# Altium PCB iobrd.PcbDoc
Units mm, origin at the board's own origin, x right, y up, seen from the top; angles counter-clockwise.
Board outline 68.58 x 99.06 mm, 2 copper layers (Top Layer, Bottom Layer); 69 components, 62 nets, 265 pads, 131 vias.
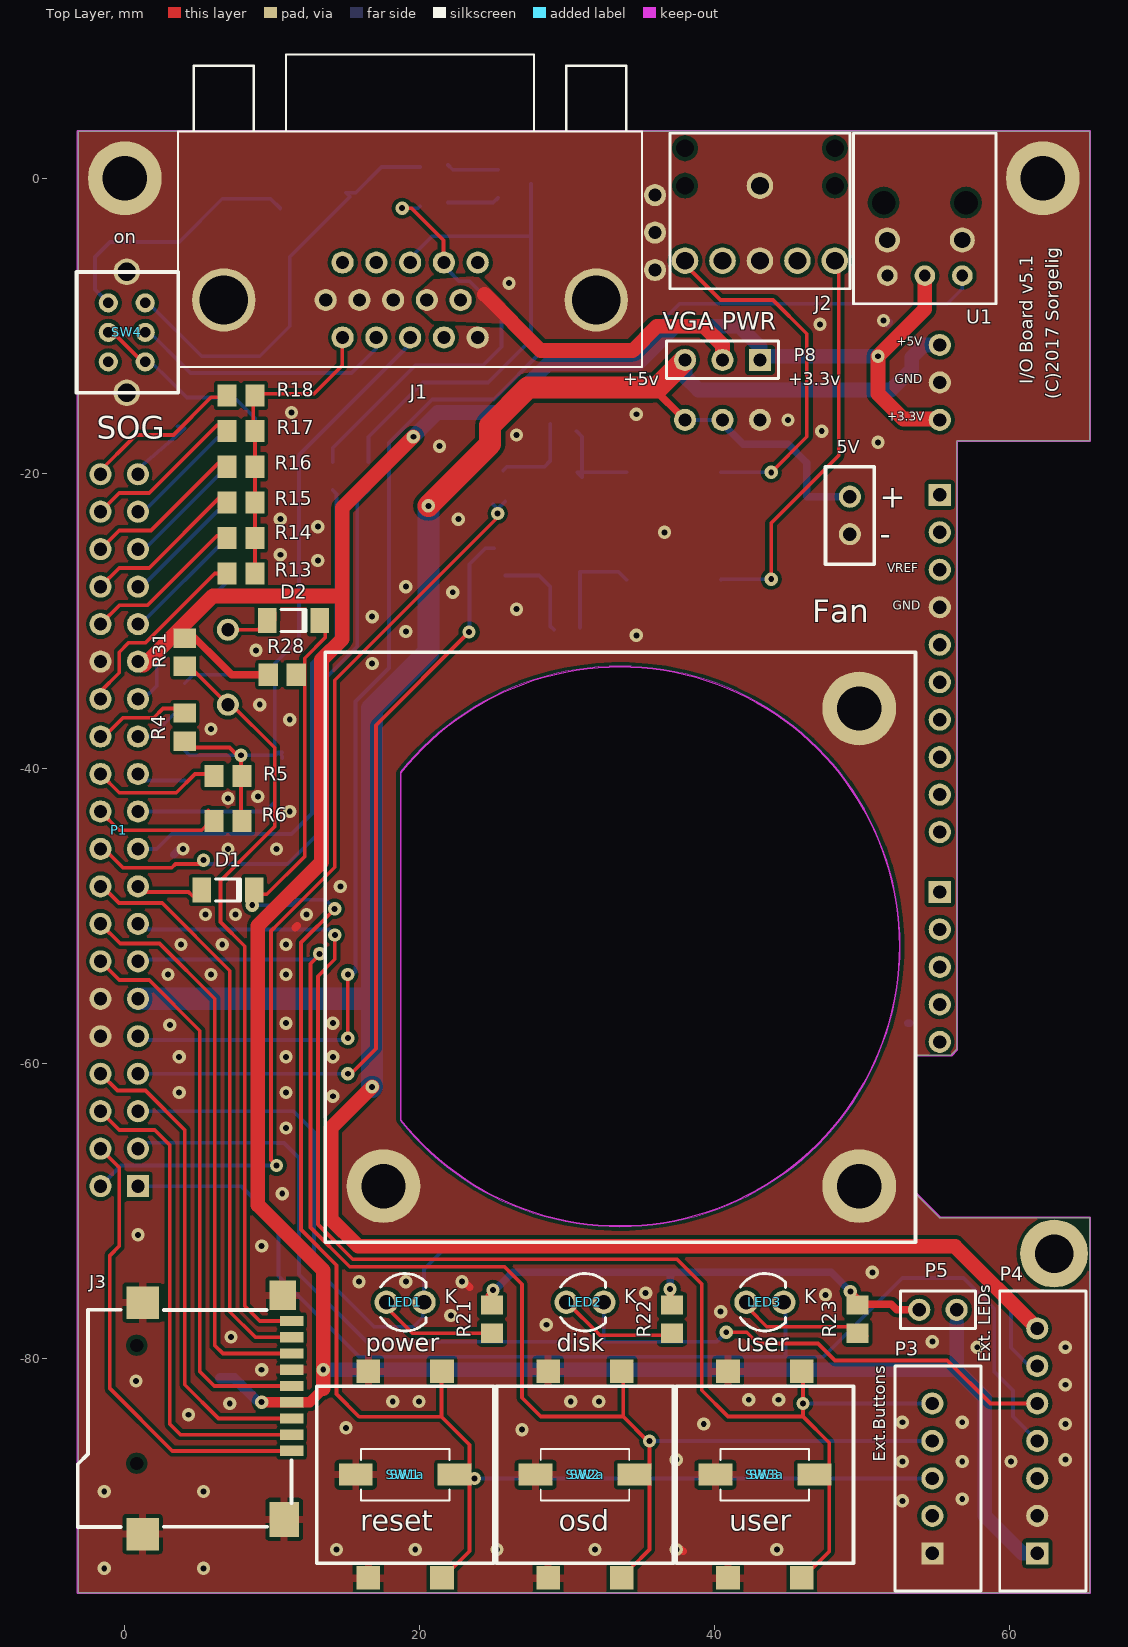
[diagram p0: Top Layer view]
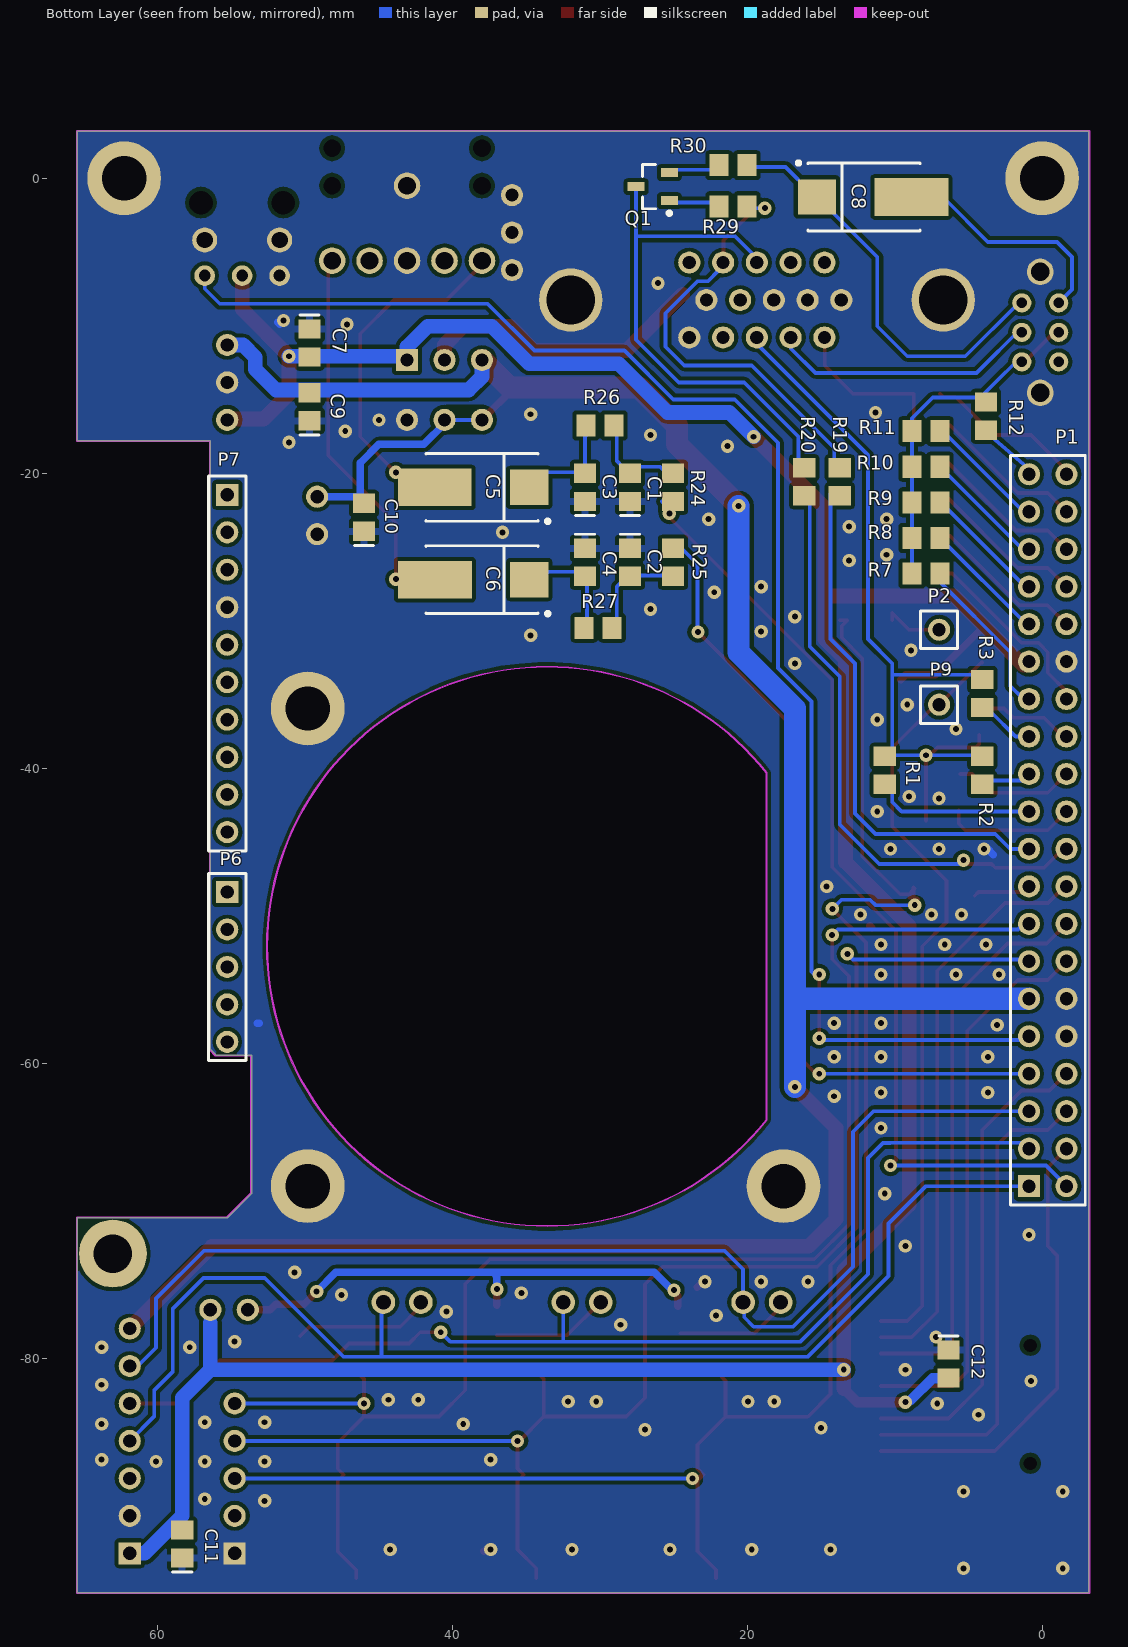
[diagram p1: Bottom Layer view, seen from below]

## Layer stack, top to bottom
Top Solder: solder mask 0.0102, Solder Resist, Dk 3.5
Top Layer: signal copper 0.0356
Dielectric 1: dielectric 0.32, FR-4, Dk 4.8
Bottom Layer: signal copper 0.0356
Bottom Solder: solder mask 0.0102, Solder Resist, Dk 3.5

## Board outline
55.245,-70.485 53.594,-68.834 53.594,-59.436 56.007,-59.436 56.388,-59.055 56.388,-17.78 65.405,-17.78 65.405,3.175 -3.175,3.175 -3.175,-95.885 65.405,-95.885 65.405,-70.485
cut-out: 18.669,-40.281 18.669,-63.87 ccw(c33.565,-52.075) 33.565,-71.075 ccw(c33.565,-52.075) 52.565,-52.075 ccw(c33.565,-52.075) 33.565,-33.075 ccw(c33.565,-52.075)

## Design rules (kind name [scope] priority, off if disabled: settings)
BoardOutlineClearance [All] p1: gap=0 ignorepadtopadclearanceinfootprint=FALSE
Clearance keep-out_Clearance [OnLayer('Keep-Out Layer')] p1: gap=0 ignorepadtopadclearanceinfootprint=TRUE
Clearance [All] p2: gap=0.254 ignorepadtopadclearanceinfootprint=TRUE except(0: Arc-Hole Track-Hole SMDPad-Hole THPad-Hole Via-Hole Fill-Hole Poly-Hole Region-Hole Text-Hole)
ComponentClearance [All] p1 off: gap=0.254 collisioncheckmode=3 verticalgap=0.254 showdistances=FALSE
Height [All] p1 off: minheight=0 maxheight=25.4 prefheight=12.7
HoleSize [All] p1: absolutevalues=TRUE maxlimit=5 minlimit=0.025 maxpercent=80.000 minpercent=20.000
MinimumSolderMaskSliver [All] p1: minsoldermaskwidth=0.127
PolygonConnect PolygonConnect_comp [HasFootprint('0805')] p1: connectstyle=Relief reliefconductorwidth=0.508 reliefentries=4 polygonreliefangle="90 Angle" airgapwidth=0.254
PolygonConnect PolygonConnect_comp_2 [HasFootprint('microsd')] p2: connectstyle=Relief reliefconductorwidth=0.508 reliefentries=4 polygonreliefangle="90 Angle" airgapwidth=0.254
PolygonConnect PolygonConnect_comp_3 [HasFootprint('tact 12x12')] p3: connectstyle=Relief reliefconductorwidth=0.508 reliefentries=4 polygonreliefangle="90 Angle" airgapwidth=0.254
PolygonConnect PolygonConnect_comp_1 [HasFootprint('434111050826')] p4: connectstyle=Relief reliefconductorwidth=0.508 reliefentries=4 polygonreliefangle="90 Angle" airgapwidth=0.254
PolygonConnect [All] p5: connectstyle=Direct reliefconductorwidth=0.254 reliefentries=4 polygonreliefangle="90 Angle" airgapwidth=0.254
RoutingVias [All] p1: holewidth=0.4 width=0.9 viastyle="Through Hole" minholewidth=0.4 minwidth=0.9 maxholewidth=0.4 maxwidth=1
SilkToSilkClearance [All] p1 off: silktosilkclearance=0.254
SilkToSolderMaskClearance [IsPad] p1 off: minsilkscreentomaskgap=0.254 clearancetoexposedcopper=TRUE
SolderMaskExpansion SolderMaskExpansion_J1 [InComponent('J1')] p1: expansion=0
SolderMaskExpansion [All] p2: expansion=0.051
Width Width_power [InNetClass('power')] p1: maxlimit=2 minlimit=0.254 preferedwidth=0.508 minimp=50.000000 maximp=50.000000 favimp=50.000000
Width Width_signal [All] p2: maxlimit=0.254 minlimit=0.254 preferedwidth=0.254
24 further rules are at their usual default settings.

## Classes and differential pairs
net class power: GND NetP5_1 VCC VDD VGA_PWR

## Components (designator, comment, footprint, x,y, rotation, side; value= is the part's Value field where it differs from the comment)
C1 "C0805" 0805 27.94,-20.955 r90 bottom value=10nF
C2 "C0805" 0805 27.94,-26.035 r270 bottom value=10nF
C3 "C0805" 0805 30.988,-20.955 r90 bottom value=10nF
C4 "C0805" 0805 30.988,-26.035 r270 bottom value=10nF
C5 "T520D" D 37.973,-20.955 r0 bottom value=100uF
C6 "T520D" D 37.966,-27.216 r0 bottom value=100uF
C7 "C0805" 0805 49.657,-11.176 r270 bottom value=1uF
C8 "T520D" D 12.065,-1.27 r180 bottom value=100uF
C9 "C0805" 0805 49.657,-15.494 r90 bottom value=10uF
C10 "C0805" 0805 45.974,-22.987 r90 bottom value=10uF
C11 "C0805" 0805 58.293,-92.583 r90 bottom value=10uF
C12 "C0805" 0805 6.35,-80.391 r270 bottom value=10uF
D1 "BAV100" SOD80C 6.985,-48.26 r0 top
D2 "BAV100" SOD80C 11.43,-29.972 r0 top
J1 "vga" VGA 19.304,3.175 r0 top locked
J2 "Audio" phonejack 43.053,3.048 r0 top locked
J3 "microsd" microsd 0.803,-84.072 r90 top locked
LED1 "power" "Type 3mm" 19.002,-76.2 r0 top locked
LED2 "disk" "Type 3mm" 31.194,-76.2 r0 top locked
LED3 "user" "Type 3mm" 43.386,-76.2 r0 top locked
P1 "GPIO1" HDR2X20 0.889,-68.326 r90 top locked
P2 "Header 1" "Header 1" 6.985,-30.607 r180 bottom locked
P3 "Ext.Buttons" HDR1X5 54.737,-93.218 r90 top locked
P4 "Ext. LEDs" HDR1X7 61.849,-93.218 r90 top locked
P5 "LEDs on/off" HDR1X2 53.848,-76.708 r0 top
P6 "Header 5" HDR1X5 55.245,-48.387 r270 bottom locked
P7 "Header 10" HDR1X10 55.245,-21.463 r270 bottom locked
P8 "VGA PWR" HDR1X3 43.053,-12.319 r180 top
P9 "Header 1" "Header 1" 6.985,-35.687 r180 bottom locked
Q1 "BC847" SOT-23B_N 26.398,-0.569 r0 bottom
R1 "510" 6-0805 10.668,-40.132 r270 bottom
R2 "1.1K" 6-0805 4.064,-40.132 r270 bottom
R3 "2.2K" 6-0805 4.064,-34.925 r270 bottom
R4 "4.3K" 6-0805 4.064,-37.211 r90 top
R5 "9.1K" 6-0805 6.985,-40.513 r180 top
R6 "18K" 6-0805 6.985,-43.561 r180 top
R7 "510" 6-0805 7.874,-26.797 r180 bottom
R8 "1.1K" 6-0805 7.874,-24.384 r180 bottom
R9 "2.2K" 6-0805 7.874,-21.971 r180 bottom
R10 "4.3K" 6-0805 7.874,-19.558 r180 bottom
R11 "9.1K" 6-0805 7.874,-17.145 r180 bottom
R12 "18K" 6-0805 3.81,-16.129 r270 bottom
R13 "510" 6-0805 7.874,-26.797 r0 top
R14 "1.1K" 6-0805 7.874,-24.384 r0 top
R15 "2.2K" 6-0805 7.874,-21.971 r0 top
R16 "4.3K" 6-0805 7.874,-19.558 r0 top
R17 "9.1K" 6-0805 7.874,-17.145 r0 top
R18 "18K" 6-0805 7.874,-14.732 r0 top
R19 "100" 6-0805 13.716,-20.574 r270 bottom
R20 "100" 6-0805 16.129,-20.574 r270 bottom
R21 "200" 6-0805 24.892,-77.343 r270 top
R22 "200" 6-0805 37.084,-77.343 r270 top
R23 "200" 6-0805 49.657,-77.343 r270 top
R24 "560" 6-0805 25.019,-20.955 r90 bottom
R25 "560" 6-0805 25.019,-26.035 r270 bottom
R26 "560" 6-0805 29.972,-16.764 r0 bottom
R27 "560" 6-0805 30.099,-30.48 r0 bottom
R28 "10K" 6-0805 10.668,-33.655 r180 top
R29 "1K" 6-0805 20.955,-1.905 r0 bottom
R30 "680" 6-0805 20.955,0.889 r0 bottom
R31 "10K" 6-0805 4.064,-32.131 r90 top
SW1 "reset" 434111050826 19.002,-87.884 r0 top locked
SW1a "" "tact 12x12" 19.002,-87.884 r0 top locked
SW2 "osd" 434111050826 31.194,-87.884 r0 top locked
SW2a "" "tact 12x12" 31.194,-87.884 r0 top locked
SW3 "user" 434111050826 43.386,-87.884 r0 top locked
SW3a "" "tact 12x12" 43.386,-87.884 r0 top locked
SW4 "SOG" "SW DPDT" 0.127,-10.45 r0 top locked
U1 "Toslink" TOSLINK 54.229,-6.604 r0 top locked

## Footprints (in the part's own frame and the unit in brackets; to place one, negate y for a bottom-side part, rotate by r counter-clockwise, add the part's x,y. Pads: shape width x height; smd on the part's side, far side on the other; paste and mask are expansions set on the pad)
6-0805 [mm] "Chip Resistor; Body 2 x 1.2 mm (LxW typ)"
  rect 1.3x1.5 smd: 1(-0.95,0) 2(0.95,0)
0805 [mm] "Chip Capacitor; Body 2.0 x 1.2 mm (LxW typ)"
  rect 1.3x1.5 smd: 1(-0.95,0) 2(0.95,0)
  silkscreen extent -1.9,-0.65 -1.9,0.65
434111050826 [mm] "6.0*3.5mm vertical type, SMD, height 5.0mm, white actuator, 260gf, T&R"
  rect 2.3x1.5 smd: 1(-3.35,0) 2(3.35,0)
  silkscreen extent -3,-1.75 3,1.75, body extent -4,-1.75 4,1.75, height 5
D [mm] "Capacitor, SM Tantalum; Body 7.3 x 4.3 mm (LxW typ)"
  rect 2.6x2.4 smd: 1(-3.2,0)
  rect 5x2.55 smd: 2(3.2,0)
  silkscreen extent -4.57,-2.3 3.8,2.42
HDR1X2 [mm] "Connector; Header; 2 Position"
  round 1.5 hole 0.9: 1(0,0) 2(2.54,0)
  silkscreen extent -1.27,-1.27 3.81,1.27
HDR1X3 [mm] "Connector; Header; 3 Position"
  rect 1.5x1.5 hole 0.9: 1(0,0)
  round 1.5 hole 0.9: 2(2.54,0) 3(5.08,0)
  silkscreen extent -1.27,-1.27 6.35,1.27
HDR1X5 [mm] "Connector; Header; 5 Position"
  rect 1.5x1.5 hole 0.9: 1(0,0)
  round 1.5 hole 0.9: 2(2.54,0) 3(5.08,0) 4(7.62,0) 5(10.16,0)
  silkscreen extent -2.54,-3.3 12.7,2.54
HDR1X7 [mm] "Connector; Header; 7 Position"
  rect 1.5x1.5 hole 0.9: 1(0,0)
  round 1.5 hole 0.9: 2(2.54,0) 3(5.08,0) 4(7.62,0) 5(10.16,0) 6(12.7,0) 7(15.24,0)
  silkscreen extent -2.54,-3.3 17.78,2.54
HDR1X10 [mm] "Connector; Header; 10 Position"
  rect 1.5x1.5 hole 0.9: 1(0,0)
  round 1.5 hole 0.9: 2(2.54,0) 3(5.08,0) 4(7.62,0) 5(10.16,0) 6(12.7,0) 7(15.24,0) 8(17.78,0) 9(20.32,0) 10(22.86,0)
  silkscreen extent -1.27,-1.27 24.13,1.27
HDR2X20 [mm] "Connector; Header; 20x2 Position"
  rect 1.5x1.5 hole 0.9: 1(0,0)
  round 1.5 hole 0.9: 2(0,2.54) 3(2.54,0) 4(2.54,2.54) 5(5.08,0) 6(5.08,2.54) 7(7.62,0) 8(7.62,2.54) 9(10.16,0) 10(10.16,2.54) 11(12.7,0) 12(12.7,2.54) 13(15.24,0) 14(15.24,2.54) 15(17.78,0) 16(17.78,2.54) 17(20.32,0) 18(20.32,2.54) 19(22.86,0) 20(22.86,2.54) 21(25.4,0) 22(25.4,2.54) 23(27.94,0) 24(27.94,2.54) 25(30.48,0) 26(30.48,2.54) 27(33.02,0) 28(33.02,2.54) 29(35.56,0) 30(35.56,2.54) 31(38.1,0) 32(38.1,2.54) 33(40.64,0) 34(40.64,2.54) 35(43.18,0) 36(43.18,2.54) 37(45.72,0) 38(45.72,2.54) 39(48.26,0) 40(48.26,2.54)
"Header 1" [mm]
  round 1.5 hole 0.9: 1(0,0)
  silkscreen extent -1.27,-1.27 1.25,1.27
microsd [mm]
  rect 0.7x1.6 smd: 1(-2.2,-10.5) 2(-1.1,-10.5) 3(0,-10.5) 4(1.1,-10.5) 5(2.2,-10.5) 6(3.3,-10.5) 7(4.4,-10.5) 8(5.5,-10.5) 9(6.6,-10.5)
  rect 2x1.8 smd mask+0.1: 10(8.35,-9.9)
  rect 2.2x2.2 smd mask+0.1: 11(7.85,-0.4) 12(-7.85,-0.4)
  rect 2.4x2 smd mask+0.1: 13(-6.85,-10)
  round 0 hole 0.9 unplated mask-0.9: ""(-3.05,0) ""(4.95,0)
  silkscreen extent -7.37,-10.5 7.37,4
phonejack [mm]
  round 1.8 hole 1.2: 1(0,-8.636) 1(0,-3.556) 2(-5.08,-8.636) 3(2.54,-8.636) 4(5.08,-8.636) 5(-2.54,-8.636)
  round 1 hole 1.2 unplated: ""(-5.08,-3.556) ""(-5.08,-1.016) ""(5.08,-3.556) ""(5.08,-1.016)
  silkscreen extent -6.1,-10.54 6.1,0
SOD80C [mm] "Metal Electrode Face (MELF) Diode; Body 3.5 x 1.6 mm (LxDia)"
  rect 1.25x1.7 smd: 1(-1.775,0) 2(1.775,0)
  silkscreen extent -0.85,-0.75 0.85,0.75
SOT-23B_N [mm] "SOT23, 3-Leads, Body 2.9x1.3mm, Pitch 0.95mm, Lead Span 2.4mm, IPC Medium Density"
  rect 1.15x0.6 smd: 1(-1.125,0.95) 2(-1.125,-0.95) 3(1.125,0)
  silkscreen extent -1.25,-1.5 0.7,1.92, body extent -0.7,-1.5 0.7,1.5, height 1.14
"SW DPDT" [mm]
  round 1.3 hole 0.7: 1(-1.25,2) 2(-1.25,0) 3(-1.25,-2) 4(1.25,-2) 5(1.25,0) 6(1.25,2)
  round 1.8 hole 1.25: 7(0,-4.1) 7(0,4.1)
  silkscreen extent -3.4,-4.1 3.5,4.1
"tact 12x12" [mm]
  rect 1.6x1.6 smd: 1(-2.5,7) 2(2.5,7) 3(-2.5,-7) 4(2.5,-7)
  silkscreen extent -6,-6 6,6
TOSLINK [mm]
  round 1.7 hole 1.1: 0(-2.54,2.413) 0(2.54,2.413)
  round 1.4 hole 0.8: 1(2.54,0) 2(0,0) 3(-2.54,0)
  round 1 hole 1.6 unplated: ""(-2.794,4.953) ""(2.794,4.953)
  silkscreen extent -4.83,-1.91 4.83,9.65
"Type 3mm" [mm] "THT, LED-3mm, 2pin- Body 4.15mm(max)"
  round 1.6 hole 1: 1(1.27,0) 2(-1.27,0)
  silkscreen extent -1.66,-1.95 1.4,1.95, body extent -1.93,-1.94 1.87,1.94, height 10.9
VGA [mm]
  round 1.5 hole 0.9: 1(-4.545,-13.97) 2(-2.255,-13.97) 3(0.035,-13.97) 4(2.325,-13.97) 5(4.615,-13.97) 6(-5.688,-11.43) 7(-3.402,-11.43) 8(-1.116,-11.43) 9(1.17,-11.43) 10(3.456,-11.43) 11(-4.545,-8.89) 12(-2.255,-8.89) 13(0.035,-8.89) 14(2.325,-8.89) 15(4.615,-8.89)
  round 4.3 hole 3.302: 16(-12.597,-11.43) 17(12.651,-11.43)
  silkscreen extent -15.7,-15.98 15.75,5.21

## Part data
C1 C2 C3 C4 C7 C9 C10 C11 C12: "Ceramic Chip Capacitor - Standard", PackageDocument=Mar-2001, Code_IPC=2012[0805], Code_JEITA=0805, ComponentLink1Description="Manufacturer Link", ComponentLink1URL=http://www.kemet.com/, ComponentLink2Description=Datasheet, ComponentLink2URL=http://www.kemet.com/kemet/web/homepage/kechome.nsf/vapubfilesname/F3102TA.pdf/$file/F3102TA.pdf, DatasheetDocument=Mar-2001, LatestRevisionDate=19-Mar-2004, LatestRevisionNote="Silkscreen size reduced.", Note="Footprint corresponds to dimensions for bulk cassette packaging. This case size has tightened tolerances.", PackageReference=0805, Published=17-Jul-2002, Publisher="Altium Limited"
C5 C6 C8: "Polymer Tantalum Chip Capacitor, T520 Series - KO-CAP Polymer", PackageDocument=Mar-2001, Code_JEITA=7343-31, ComponentLink1Description="Manufacturer Link", ComponentLink1URL=http://www.kemet.com/, ComponentLink2Description=Datasheet, ComponentLink2URL=http://www.kemet.com/kemet/web/homepage/kechome.nsf/vapubfilesname/F3102TA.pdf/$file/F3102TA.pdf, DatasheetDocument=Mar-2001, LatestRevisionDate=19-Mar-2004, LatestRevisionNote="Silkscreen dimensions re-sized.", PackageReference=D, Published=17-Jul-2002, Publisher="Altium Limited"
D1: "General-purpose Diode", Part number=1N4148, ComponentLink1Description="Manufacturer Link", ComponentLink1URL=http://www.semiconductors.philips.com/, ComponentLink2Description=Datasheet, ComponentLink2URL=http://www.semiconductors.philips.com/acrobat/datasheets/BAV100_2.pdf, DatasheetVersion=17-Sep-1996, LatestRevisionDate=19-Mar-2004, LatestRevisionNote="Silkscreen size reduced.", PackageDescription="Metal Electrode Face (MELF) Diode; Body 3.5 x 1.6 mm (LxDia)", PackageReference=SOD80C, PackageVersion=Jan-2002, Published=17-Sep-2003, Publisher="Altium Limited"
D2: "General-purpose Diode", PartNumber=1N4148, ComponentLink1Description="Manufacturer Link", ComponentLink1URL=http://www.semiconductors.philips.com/, ComponentLink2Description=Datasheet, ComponentLink2URL=http://www.semiconductors.philips.com/acrobat/datasheets/BAV100_2.pdf, DatasheetVersion=17-Sep-1996, LatestRevisionDate=19-Mar-2004, LatestRevisionNote="Silkscreen size reduced.", PackageDescription="Metal Electrode Face (MELF) Diode; Body 3.5 x 1.6 mm (LxDia)", PackageReference=SOD80C, PackageVersion=Jan-2002, Published=17-Sep-2003, Publisher="Altium Limited"
J2: library part phonejack
LED1 LED2 LED3: library part 151031SS04000, "THT LED round mono-color color lens, WL-TMRW, Super Red", Emitting color="Super Red", ComponentLink1Description="Manufacturer URL", ComponentLink1URL=http://www.we-online.com, ComponentLink2Description=Datasheet, ComponentLink2URL=http://katalog.we-online.de/pbs/datasheet/7448042001.pdfhttp://katalog.we-online.de/pbs/datasheet/7448042001.pdfhttp://katalog.we-online.de/pbs/datasheet/7448042001.pdfhttp://katalog.we-online.de/pbs/datasheet/151031SS04000.pdf, PackageReference="Type 3mm", PartNumber=151031SS04000
P1: library part "Header 20X2", "Header, 20-Pin, Dual row", LatestRevisionDate=17-Jul-2002, LatestRevisionNote="Re-released for DXP Platform.", Publisher="Altium Limited"
P3: library part "Header 5", "Header, 5-Pin", LatestRevisionDate=17-Jul-2002, LatestRevisionNote="Re-released for DXP Platform.", Publisher="Altium Limited"
P4: library part "Header 7", "Header, 7-Pin", LatestRevisionDate=17-Jul-2002, LatestRevisionNote="Re-released for DXP Platform.", Publisher="Altium Limited"
P5: library part "Header 2", "Header, 2-Pin", LatestRevisionDate=17-Jul-2002, LatestRevisionNote="Re-released for DXP Platform.", Publisher="Altium Limited"
P6: "Header, 5-Pin", LatestRevisionDate=17-Jul-2002, LatestRevisionNote="Re-released for DXP Platform.", Publisher="Altium Limited"
P7: "Header, 10-Pin", LatestRevisionDate=17-Jul-2002, LatestRevisionNote="Re-released for DXP Platform.", Publisher="Altium Limited"
P8: library part "Header 3", "Header, 3-Pin", LatestRevisionDate=17-Jul-2002, LatestRevisionNote="Re-released for DXP Platform.", Publisher="Altium Limited"
Q1: library part QNPN, "NPN Bipolar Transistor", LatestRevisionDate=29-May-2009, LatestRevisionNote="IPC-7351 Footprint Added.", PackageDescription="3-Pin SOT-23 Package 0.95 mm Pitch, 2.4 mm Lead Span", PackageReference=SOT-23B, PackageVersion=Aug-1999, Published=8-Jun-2000, Publisher="Altium Limited"
R1 R2 R3 R4 R5 R6 R7 R8 R9 R10 R11 R12 R13 R14 R15 R16 R17 R18 R19 R20 R21 R22 R23 R24 R25 R26 R27 R28 R29 R30 R31: library part ERJ6RS, "Low Ohmic Value Thick Film Chip Resistor, 0.1 Ohm to 0.2 Ohm Range, 1%, 2% and 5% Tolerance, 0805 Size, 0.125 W", PackageDocument=Mar-2003, Code_IPC="2012 [0805]", ComponentLink1Description="Manufacturer Link", ComponentLink1URL=http://www.panasonic.com/industrial/components/resistive_products.htm, ComponentLink2Description=Datasheet, ComponentLink2URL=http://www.panasonic.com/industrial/components/pdf/AOA0000CE3.pdf, LatestRevisionDate=19-Mar-2004, LatestRevisionNote="Silkscreen size reduced.", PackageReference=6-0805, Published=17-Dec-2003, Publisher="Altium Limited"
SW1 SW2 SW3: library part 434111050826, "WS-TASV SMD Tact Switch 6.0X3.5 mm", ComponentLink1Description="Manufacturer URL", ComponentLink1URL=http://www.we-online.com, ComponentLink2Description=Datasheet, ComponentLink2URL=http://katalog.we-online.de/em/datasheet/434111050826.pdf, NoPins=02, PackageReference=434111050826, PartNumber=434111050826
SW1a SW2a SW3a: library part "tact 12x12"
SW4: library part "SW DPDT"
U1: Part number=FC684208T

## Free pads (board coordinates)
  round 5 hole 3: ""(0,0) ""(17.526,-68.326) ""(49.784,-68.326) ""(49.784,-35.941) ""(62.23,0)
  round 1.5 hole 0.9: ""(35.941,-6.223) ""(35.941,-3.683) ""(35.941,-1.143) ""(37.973,-16.383) ""(40.513,-16.383) ""(43.053,-16.383) ""(49.149,-24.13) ""(49.149,-21.59) ""(55.245,-16.383) ""(55.245,-13.843) ""(55.245,-11.303)
  round 4.6 hole 2.6: ""(62.992,-72.898)

## Via types
v1: diameter 0.9, hole 0.4, Top Layer to Bottom Layer, tented both sides, 131 vias

## Nets (pads, with @x,y where several pads share a name; then routed paths per layer and width w, separated by ;. In a path a pad name is that pad's centre, name@x,y a point inside that pad or via, vN(x,y) a via of type N, cw(c..) or ccw(c..) an arc to the next point about the centre after c; other vN are vias at no path point)
B: J1.3 R1.1 R2.1 R3.1 R4.1 R5.1 R6.1 | length 54.4
  Top Layer w0.254: R4.1@4.257,-37.719 4.257,-38.354 4.486,-38.583 7.087,-38.583 v1@7.493,-38.989 ; R6.1@7.874,-43.561 7.874,-39.309 7.681,-39.116 v1(7.874,-39.116) ; J1.3@19.312,-11.271 J1.3@19.339,-11.244
  Bottom Layer w0.254: R2.1@4.064,-38.801 4.379,-39.116 v1(7.874,-39.116) 10.226,-39.116 R1.1@10.414,-38.928 ; R3.1@4.064,-34.229 4.638,-33.655 10.16,-33.655 ; R1.1@10.16,-38.862 10.16,-33.655 ; R1.1@10.668,-39.309 R1.1 R1.1@10.414,-38.928 ; R1.1@10.669,-38.928 R1.1@10.414,-38.928 ; J1.3@19.304,-11.263 J1.3@19.339,-11.228 ; J1.3 J1.3@19.339,-11.228 ; 10.16,-33.655 10.16,-32.893 11.811,-31.242 11.811,-18.772 19.339,-11.244 J1.3@19.339,-11.228
btn_osd: P1.13 P3.4 SW2.2 SW2a.2 SW2a.4 | length 98
  Top Layer w0.254: v1(13.208,-52.578) 12.954,-52.324 12.954,-52.873 12.581,-53.246 12.581,-71.128 15.24,-73.787 25.74,-73.787 26.924,-74.971 26.924,-82.677 28.194,-83.947 33.782,-83.947 ; SW2a.4@34.298,-94.884 34.298,-94.226 35.56,-92.964 35.56,-88.296 35.148,-87.884 35.56,-87.472 v1(35.56,-85.598) 35.433,-85.598 33.782,-83.947 ; SW2a.2@34.298,-80.884 33.782,-81.4 33.782,-83.947
  Bottom Layer w0.254: P1.13 1.016,-53.213 1.27,-52.959 12.827,-52.959 v1(13.208,-52.578) ; v1(35.56,-85.598) P3.4
btn_reset: D1.2 D2.2 P3.3 R28.1 SW1.2 SW1a.2 SW1a.4 | length 120.7
  Top Layer w0.254: D1.2@8.4,-48.877 8.463,-48.814 D1.2@8.717,-48.814 ; v1(8.636,-49.276) 8.636,-48.946 D1.2@8.814,-48.768 ; D1.2@8.715,-48.082 8.649,-48.149 8.646,-48.152 D1.2@8.717,-48.223 ; D2.2@13.713,-29.972 D2.2 13.589,-30.356 13.589,-31.139 12.192,-32.536 12.192,-45.974 9.625,-48.541 9.041,-48.541 D1.2@8.915,-48.666 ; v1(14.224,-49.53) 11.938,-51.816 11.938,-71.271 14.351,-73.684 14.351,-82.423 15.882,-83.954 21.463,-83.954 ; SW1a.2@21.71,-81.28 21.463,-81.527 21.463,-83.954 ; SW1a.4@22.106,-94.884 22.106,-94.335 23.368,-93.073 23.368,-88.296 22.956,-87.884 23.368,-87.472 23.368,-85.859 21.463,-83.954 ; SW1.2@23.114,-87.884 23.368,-88.138 v1(23.707,-88.138) ; D1.2@8.717,-48.814 D1.2@8.763,-48.768 ; D1.2@8.717,-48.814 D1.2@8.717,-48.768 ; D1.2@8.717,-48.768 D1.2@8.763,-48.768 ; D1.2@8.717,-48.768 8.717,-48.641 D1.2@8.717,-48.468 ; D1.2@8.717,-48.468 D1.2@8.717,-48.223 ; D1.2@8.717,-48.468 D1.2@8.89,-48.641 ; D1.2@8.717,-48.223 9.013,-48.518 D1.2@8.89,-48.641 ; D1.2@8.763,-48.768 D1.2@8.814,-48.768 ; D1.2@8.763,-48.768 D1.2@8.89,-48.641 ; D1.2@8.814,-48.768 D1.2@8.915,-48.666 ; D1.2@8.814,-48.768 9.017,-48.768 D1.2@8.915,-48.666 ; D1.2@8.89,-48.641 D1.2@8.915,-48.666
  Bottom Layer w0.254: v1(8.636,-49.276) 11.303,-49.276 11.664,-48.915 13.609,-48.915 v1(14.224,-49.53) ; v1(23.707,-88.138) P3.3
btn_user: P1.15 P3.5 SW3.2 SW3a.2 SW3a.4 | length 101.1
  Top Layer w0.254: v1(14.232,-51.3) 14.232,-52.951 13.089,-54.094 13.089,-70.918 15.45,-73.279 37.424,-73.279 39.109,-74.964 39.109,-82.162 40.894,-83.947 45.974,-83.947 ; SW3a.4@46.49,-94.884 46.49,-94.353 47.752,-93.091 47.752,-88.296 47.34,-87.884 47.745,-87.479 47.745,-85.718 45.978,-83.951 ; SW3a.2@46.49,-80.884 45.974,-81.4 v1(45.974,-83.058) 45.974,-83.947 ; 45.974,-83.947 45.982,-83.947 45.978,-83.951 ; 45.974,-83.947 45.974,-83.955 45.978,-83.951 ; 45.974,-83.947 45.978,-83.951
  Bottom Layer w0.254: P1.15@0.635,-50.546 P1.15 1.26,-50.546 1.641,-50.927 13.859,-50.927 v1(14.232,-51.3) ; v1(45.974,-83.058) P3.5
CLK: J3.5 P1.14 | length 38
  Top Layer w0.254: P1.14 -0.381,-54.356 1.651,-54.356 5.08,-57.785 5.08,-80.899 6.053,-81.872 J3.5@10.922,-81.872
CMD: J3.3 P1.8 | length 32.4
  Top Layer w0.254: P1.8 -0.508,-61.849 1.397,-61.849 4.064,-64.516 4.064,-81.788 6.348,-84.072 J3.3@10.922,-84.072
DAT0: J3.7 P1.16 | length 38.4
  Top Layer w0.254: P1.16 -0.314,-51.883 2.353,-51.883 6.096,-55.626 6.096,-79.121 6.647,-79.672 J3.7@10.922,-79.672
DAT1: J3.8 P1.18 | length 38.8
  Top Layer w0.254: P1.18 -1.524,-48.006 -0.393,-49.137 2.528,-49.137 7.112,-53.721 7.112,-76.835 8.849,-78.572 J3.8@10.922,-78.572
DAT2: J3.1 P1.4 | length 30.7
  Top Layer w0.254: P1.4 -0.381,-67.056 -0.381,-72.39 -1.016,-73.025 -1.016,-82.042 3.214,-86.272 J3.1@10.922,-86.272
DAT3: J3.2 P1.6 | length 32.7
  Top Layer w0.254: P1.6 -0.381,-64.516 2.032,-64.516 3.048,-65.532 3.048,-84.455 3.765,-85.172 J3.2@10.922,-85.172
G: J1.2 SW4.5 | length 18.7
  Bottom Layer w0.254: SW4.5 1.377,-10.14 4.445,-13.208 15.363,-13.208 17.018,-11.553 J1.2@17.018,-10.795
GND: C1.1 C2.1 C3.1 C4.1 C7.1 C9.1 C10.1 C11.1 C12.1 J1.5 J1.6 J1.7 J1.8 J1.10 J1.16 J1.17 J2.1 J3.6 J3.10 J3.11 J3.12 J3.13 P1.10 P1.12 P1.30 P3.1 P4.2 P7.4 pad.@0,0 pad.@17.526,-68.326 pad.@35.941,-1.143 pad.@35.941,-3.683 pad.@35.941,-6.223 pad.@43.053,-16.383 pad.@49.149,-24.13 pad.@49.784,-35.941 pad.@49.784,-68.326 pad.@55.245,-13.843 pad.@62.23,0 SW1.1 SW1a.1 SW1a.3 SW2.1 SW2a.1 SW2a.3 SW3.1 SW3a.1 SW3a.3 SW4.7 U1.0 U1.3 | length 4
  Top Layer w0.508: v1@6.858,-45.339 v1(6.985,-45.466) ; v1@7.493,-50.038 v1(7.493,-49.911) ; v1@9.144,-35.941 8.89,-35.687 v1(9.144,-35.687) ; 11.557,-50.8 11.684,-50.673 ; v1(22.86,-74.803) 22.987,-74.803 23.368,-75.184 ; v1(37.386,-92.964) 37.719,-92.964 37.846,-93.091
  Bottom Layer w0.508: 3.302,-45.847 3.683,-45.466 v1(3.937,-45.466) ; v1(12.319,-49.911) v1@12.446,-49.911 ; v1@25.908,-7.239 v1(26.035,-7.112) ; v1(51.435,-9.652) 51.689,-9.906 v1@51.816,-9.779 ; 53.086,-57.277 53.213,-57.277
  other v1: -1.397,-94.234 5.334,-94.234 14.351,-92.964 19.685,-92.964 25.225,-92.964 31.877,-92.964 44.196,-92.964 52.705,-89.662 56.769,-89.535 -1.397,-89.027 5.334,-89.027 52.705,-86.995 56.769,-86.995 60.071,-86.995 37.386,-86.868 63.754,-86.868 26.924,-84.836 14.986,-84.709 39.243,-84.455 63.754,-84.455 52.705,-84.328 56.769,-84.328 4.318,-83.82 7.112,-83.058 18.161,-82.931 19.939,-82.931 30.226,-82.931 32.131,-82.931 42.291,-82.804 44.323,-82.804 63.754,-81.788 0.762,-81.534 9.271,-80.772 57.785,-79.248 63.754,-79.248 54.737,-78.867 7.199,-78.552 28.575,-77.724 22.098,-77.089 40.386,-76.835 47.498,-75.692 35.306,-75.565 15.875,-74.803 19.05,-74.803 50.673,-74.168 9.271,-72.39 0.889,-71.628 10.668,-68.834 10.922,-64.389 14.097,-62.23 3.683,-61.976 10.922,-61.976 3.683,-59.563 10.922,-59.563 14.097,-59.563 3.048,-57.404 10.922,-57.277 14.097,-57.277 2.921,-53.975 5.842,-53.975 10.922,-53.975 3.81,-51.943 6.604,-51.943 10.922,-51.943 5.461,-49.911 14.605,-48.006 10.287,-45.466 11.176,-42.926 6.985,-42.037 9.017,-41.91 5.842,-37.338 11.176,-36.703 16.764,-32.893 8.89,-32.004 34.671,-30.988 19.05,-30.734 16.764,-29.718 26.543,-29.21 22.225,-28.067 19.05,-27.686 13.081,-25.908 10.541,-25.527 36.576,-24.003 13.081,-23.622 10.541,-23.114 22.606,-23.114 21.336,-18.161 51.054,-17.907 26.543,-17.399 47.244,-17.145 44.958,-16.383 34.671,-16.002 11.303,-15.875 47.117,-9.906
HSync: J1.13 Q1.3 R20.1 | length 35.1
  Bottom Layer w0.254: R20.1@16.51,-19.243 16.51,-17.526 20.193,-13.843 24.638,-13.843 27.529,-10.952 27.529,-3.937 ; J1.13 19.339,-5.426 20.828,-3.937 27.529,-3.937 ; Q1.3@27.529,-0.381 27.529,-3.937
led_disk: LED2.1 P1.3 P4.5 | length 77.9
  Top Layer w0.254: v1(40.767,-78.232) 42.164,-78.232 42.926,-78.994 46.99,-78.994 48.133,-80.137 55.753,-80.137 58.674,-83.058 P4.5
  Bottom Layer w0.254: P1.3@0.635,-65.786 P1.3 1.285,-65.39 10.296,-65.39 10.303,-65.397 10.787,-65.397 11.811,-66.421 11.811,-74.295 16.383,-78.867 32.464,-78.867 ; LED2.1@32.464,-76.589 LED2.1 31.785,-76.2 32.464,-76.879 32.464,-78.867 ; v1(40.767,-78.232) 40.132,-78.867 32.464,-78.867
led_power: LED1.1 P1.5 P4.6 | length 82.1
  Top Layer w0.254: P1.5@0.635,-63.246 P1.5@0.854,-63.246
  Bottom Layer w0.254: P1.5@0.635,-63.246 P1.5 11.43,-63.246 12.827,-64.643 12.827,-73.787 16.891,-77.851 19.558,-77.851 20.193,-77.216 20.193,-76.2 LED1.1 20.272,-73.962 21.533,-72.701 56.826,-72.701 60.071,-75.946 60.071,-79.286 61.303,-80.518 P4.6
led_user: LED3.1 P1.1 P4.4 | length 82
  Bottom Layer w0.254: P1.1 7.874,-68.326 10.414,-70.866 10.414,-74.422 15.875,-79.883 44.783,-79.883 ; LED3.1 LED3.1@45.26,-76.2 ; LED3.1@44.783,-76.677 44.783,-79.883 ; P4.4 60.198,-83.947 60.198,-82.169 58.928,-80.899 58.928,-76.622 56.855,-74.549 52.705,-74.549 47.371,-79.883 44.783,-79.883
left: C5.2 J2.2 | length 24.5
  Top Layer w0.254: J2.2 37.973,-5.842 40.386,-8.255 43.942,-8.255 46.228,-10.541 46.228,-17.526 v1(43.815,-19.939)
  Bottom Layer w0.254: J2.2@37.973,-5.842 J2.2 ; C5.2@40.411,-19.939 v1(43.815,-19.939)
NetC1_2: C1.2 R24.2 R26.1 | length 6
  Bottom Layer w0.254: R24.2@25.654,-19.812 25.908,-19.558 28.448,-19.558 28.829,-19.177 R26.1@28.829,-16.637
NetC2_2: C2.2 R25.2 R27.1 | length 6.4
  Bottom Layer w0.254: 25.781,-26.924 28.067,-26.924 28.829,-27.686 28.829,-30.353 R27.1@29.083,-30.607
NetC3_2: C3.2 C5.1 R26.2 | length 7.1
  Bottom Layer w0.254: R26.2@30.607,-17.145 30.988,-17.526 C3.2@30.988,-19.939 ; C5.1@34.011,-19.939 C3.2@30.988,-19.939 ; C3.2@30.988,-19.939 30.668,-19.939 30.988,-20.259 C3.2 C3.2@30.988,-19.939
NetC4_2: C4.2 C6.1 R27.2 | length 7.2
  Bottom Layer w0.254: R27.2@30.861,-30.48 30.861,-26.67 33.458,-26.67 C6.1@34.004,-27.216
NetC8_1: C8.1 R30.1 SW4.6 | length 28.7
  Bottom Layer w0.254: SW4.6@1.357,-8.469 1.611,-8.469 5.207,-12.065 9.144,-12.065 11.176,-10.033 11.176,-5.334 15.253,-1.257 14.986,-0.991 15.646,-0.991 17.399,0.762 R30.1@20.005,0.762
NetC8_2: C8.2 SW4.1 | length 18
  Bottom Layer w0.254: SW4.1 -2.032,-7.541 -2.032,-5.334 -1.016,-4.318 3.683,-4.318 6.604,-1.397 9.881,-1.397 C8.2@10.541,-2.057
NetD1_1: D1.1 P1.17 | length 3.8
  Top Layer w0.254: P1.17@0.955,-48.197 1.146,-48.387 4.318,-48.387 4.572,-48.641
NetJ3_9: J3.9 P9.1 R31.1 | length 51.8
  Top Layer w0.254: R31.1@4.064,-32.827 4.125,-32.827 P9.1 7.239,-35.687 10.16,-38.608 10.16,-43.942 6.477,-47.625 6.477,-50.419 8.128,-52.07 8.128,-76.454 9.146,-77.472 J3.9@10.922,-77.472
NetLED1_2: LED1.2 R21.2 | length 8
  Top Layer w0.254: LED1.2@18.336,-76.2 17.868,-76.669 19.492,-78.293 R21.2@24.511,-78.293
NetLED2_2: LED2.2 R22.2 | length 7.9
  Top Layer w0.254: LED2.2@29.948,-76.176 32.203,-78.431 R22.2@36.957,-78.431
NetLED3_2: LED3.2 R23.2 | length 9.4
  Top Layer w0.254: LED3.2@42.72,-76.2 42.294,-76.626 43.52,-77.851 49.657,-77.851 R23.2@50.292,-78.486
NetP1_2: P1.2 R24.1 | length 65.4
  Top Layer w0.254: P1.2@-1.905,-68.326 P1.2@-1.623,-68.608 ; v1(10.287,-66.929) 9.906,-66.548 9.906,-51.03 10.402,-50.534 14.224,-46.712 14.224,-34.036 25.273,-22.987 v1(25.273,-22.733)
  Bottom Layer w0.254: P1.2 -0.254,-66.929 v1(10.287,-66.929) ; R24.1@24.956,-22.108 R24.1@25.076,-22.229 ; v1(25.273,-22.733) 25.273,-22.425 R24.1@25.267,-22.419 ; 25.781,-21.905 R24.1@25.267,-22.419 ; R24.1@25.076,-22.229 R24.1@25.203,-22.356 ; R24.1@25.076,-22.229 R24.1@25.203,-22.356 ; R24.1@25.203,-22.356 R24.1@25.267,-22.419 ; R24.1@25.203,-22.356 R24.1@25.267,-22.419
NetP1_7: P1.7 R25.1 | length 54.7
  Top Layer w0.254: v1(15.113,-60.706) 15.326,-60.706 17.018,-59.014 17.018,-37.084 v1(23.336,-30.766)
  Bottom Layer w0.254: P1.7@0.635,-60.706 P1.7 v1(15.113,-60.706) ; v1(23.336,-30.766) 23.368,-30.734 23.368,-26.162 24.445,-25.085 R25.1
NetP1_19: P1.19 R19.2 | length 35.8
  Bottom Layer w0.254: P1.19@0.635,-45.466 P1.19 2.159,-45.466 3.175,-44.45 11.303,-44.45 12.693,-43.06 12.693,-32.9 14.351,-31.242 14.351,-21.397 R19.2@14.097,-21.143
NetP1_20: P1.20 R20.2 | length 41.5
  Top Layer w0.254: P1.20@-1.905,-45.466 P1.20 -1.397,-45.466 -0.127,-46.736 3.175,-46.736 3.429,-46.482 5.334,-46.482 v1(5.334,-46.228)
  Bottom Layer w0.254: v1(5.334,-46.228) 5.588,-46.482 11.049,-46.482 13.716,-43.815 13.716,-33.782 15.748,-31.75 15.748,-21.905 R20.2 R20.2@16.51,-21.143
NetP1_21: P1.21 R1.2 | length 11
  Top Layer w0.254: P1.21@0.508,-42.926 P1.21@0.635,-42.926
  Bottom Layer w0.254: P1.21@0.635,-42.926 P1.21 9.525,-42.926 10.16,-42.291 R1.2@10.16,-41.209
NetP1_22: P1.22 R6.2 | length 9.2
  Top Layer w0.254: P1.22@-1.905,-42.926 P1.22 -0.381,-44.196 5.207,-44.196 5.66,-43.743 R6.2@5.66,-42.862
NetP1_23: P1.23 R2.2 | length 3.6
  Bottom Layer w0.254: P1.23@0.635,-40.386 P1.23 1.331,-40.828 R2.2@4.064,-40.828
NetP1_24: P1.24 R5.2 | length 8.5
  Top Layer w0.254: P1.24@-1.905,-40.386 P1.24 -0.381,-41.656 3.49,-41.656 4.76,-40.386 R5.2@5.527,-40.386
NetP1_25: P1.25 R3.2 | length 4.1
  Bottom Layer w0.254: P1.25@0.635,-37.846 P1.25 1.798,-37.846 3.515,-36.129 R3.2@4.064,-36.129
NetP1_26: P1.26 R4.2 | length 6.8
  Top Layer w0.254: P1.26@-1.905,-37.846 P1.26 -1.397,-37.846 -0.127,-36.576 1.952,-36.576 2.587,-35.941 3.998,-35.941 R4.2@4.064,-35.875
NetP1_27: P1.27 R7.2 | length 11.5
  Bottom Layer w0.254: P1.27@0.635,-35.306 P1.27@0.889,-35.309 ; P1.27 1.27,-35.306 2.159,-34.417 2.159,-32.131 6.924,-27.366 R7.2
NetP1_28: P1.28 R13.1 | length 13.5
  Top Layer w0.254: P1.28 -1.651,-34.798 -0.381,-33.528 -0.381,-32.131 0.254,-31.496 1.397,-31.496 6.096,-26.797 R13.1
  Bottom Layer w0.254: P1.28@-1.905,-35.306 P1.28@-1.905,-35.052
NetP1_31: P1.31 R8.2 | length 9
  Bottom Layer w0.254: P1.31@0.635,-30.226 P1.31 1.082,-30.226 R8.2 R8.2@6.924,-24.13
NetP1_32: P1.32 R14.1 | length 11.3
  Top Layer w0.254: P1.32@-1.905,-30.226 P1.32 -0.381,-28.956 1.524,-28.956 6.223,-24.257 R14.1@6.924,-24.257
NetP1_33: P1.33 R9.2 | length 9
  Bottom Layer w0.254: P1.33@0.635,-27.686 0.889,-27.94 R9.2@6.985,-21.844
NetP1_34: P1.34 R15.1 | length 11.3
  Top Layer w0.254: P1.34@-1.905,-27.686 P1.34 -0.381,-26.416 1.651,-26.416 6.35,-21.717 R15.1@6.924,-21.717
NetP1_35: P1.35 R10.2 | length 8.9
  Bottom Layer w0.254: P1.35@0.635,-25.146 P1.35 1.336,-25.146 R10.2 R10.2@6.924,-19.304
NetP1_36: P1.36 R16.1 | length 11.5
  Top Layer w0.254: P1.36@-1.905,-25.146 P1.36 -0.381,-23.876 1.778,-23.876 6.35,-19.304 R16.1@6.924,-19.304
  Bottom Layer w0.254: P1.36@-1.905,-25.146 P1.36
NetP1_37: P1.37 R11.2 | length 8.8
  Bottom Layer w0.254: P1.37@0.635,-22.606 P1.37 1.27,-22.606 6.924,-16.952 R11.2@6.924,-16.825
NetP1_38: P1.38 R17.1 | length 11.2
  Top Layer w0.254: P1.38@-1.905,-22.606 P1.38 -0.381,-21.336 1.651,-21.336 6.223,-16.764 R17.1@6.924,-16.764
NetP1_39: P1.39 R12.2 | length 4.8
  Bottom Layer w0.254: P1.39@0.635,-20.066 0.744,-19.94 0.765,-19.923 0.773,-19.809 3.439,-17.494 3.847,-17.141 3.856,-17.132 R12.2@4.064,-16.952 ; R12.2@3.576,-16.81 R12.2@3.683,-16.825
NetP1_40: P1.40 R18.1 | length 11.1
  Top Layer w0.254: P1.40@-1.905,-20.066 0.762,-17.399 3.302,-17.399 5.849,-14.852 6.677,-14.852 R18.1@6.924,-14.605
NetP5_1: P5.1 R21.1 R22.1 R23.1 | length 33.9
  Top Layer w0.508: R21.1@24.707,-76.454 24.707,-75.75 25.019,-75.438 v1(24.956,-75.374) ; R22.1@36.957,-76.393 v1(36.957,-75.311) ; v1(49.179,-75.468) 50.038,-76.327 51.943,-76.327 52.324,-76.708 P5.1@53.721,-76.708
  Bottom Layer w0.508: v1(24.956,-75.374) 25.082,-75.374 26.289,-74.168 37.211,-74.168 ; v1(36.957,-75.311) 36.957,-74.422 37.211,-74.168 ; v1(49.179,-75.468) 47.879,-74.168 37.211,-74.168
NetQ1_1: Q1.1 R29.2 | length 3.5
  Bottom Layer w0.254: R29.2@21.905,-1.651 24.971,-1.651 Q1.1@25.291,-1.331
NetQ1_2: Q1.2 R30.2 | length 3.5
  Bottom Layer w0.254: R30.2 22.225,0.569 Q1.2@25.291,0.569
NetR7_1: R7.1 R8.1 R9.1 R10.1 R11.1 R12.1 SW4.2 SW4.4 | length 23.3
  Top Layer w0.254: SW4.2@-1.319,-9.944 1.087,-12.35 1.293,-12.541 SW4.4@1.401,-12.641
  Bottom Layer w0.254: SW4.4@1.489,-12.18 2.465,-13.156 2.488,-13.156 4.191,-14.859 7.409,-14.859 8.824,-16.274 R10.1 R9.1 8.824,-24.13 R8.1 R7.1@8.824,-26.67
R: J1.1 R13.2 R14.2 R15.2 R16.2 R17.2 R18.2 | length 20.9
  Top Layer w0.254: R17.2@8.697,-16.764 8.697,-14.605 12.827,-14.605 14.732,-12.7 J1.1@14.732,-10.795 ; R13.2 R14.2 8.824,-24.257 R15.2 R16.2 8.824,-19.304 R17.2@8.824,-16.764
reset: D2.1 P2.1 | length 4.4
  Top Layer w0.254: P2.1@6.731,-30.607 P2.1 9.02,-30.607 D2.1 9.658,-29.972 10.163,-29.467 D2.1@10.163,-29.972
right: C6.2 J2.4 | length 27
  Top Layer w0.254: v1(43.815,-27.178) 43.815,-23.38 48.387,-18.808 48.387,-5.842 J2.4
  Bottom Layer w0.254: C6.2@40.404,-27.216 40.442,-27.178 v1(43.815,-27.178)
spdif: P1.9 U1.1 | length 100.7
  Top Layer w0.254: v1(15.113,-58.293) v1(15.113,-53.975)
  Bottom Layer w0.254: P1.9 1.27,-58.166 1.524,-58.42 15.367,-58.42 15.24,-58.293 v1(15.113,-58.293) ; v1(15.113,-53.975) 15.439,-53.975 15.633,-53.781 15.633,-35.473 17.907,-33.199 17.907,-17.931 20.844,-14.994 25.011,-14.994 28.321,-11.684 34.417,-11.684 37.592,-8.509 55.753,-8.509 56.769,-7.493 U1.1
VCC: C7.2 C11.2 C12.2 J3.4 P1.29 P4.1 P5.2 P8.1 pad.@55.245,-16.383 R28.2 R31.2 U1.2 | length 213.2
  Top Layer w0.508: 3.937,-30.353 7.239,-33.655 9.241,-33.655 R28.2@9.591,-34.005
  Top Layer w0.7: v1(9.271,-82.972) J3.4 12.532,-82.972 13.446,-82.058
  Top Layer w1: P1.29 1.143,-33.02 1.27,-33.02 3.937,-30.353 5.969,-28.321 14.732,-28.321 ; 13.446,-82.058 v1(13.446,-80.764) 13.446,-74.025 9.017,-69.596 9.017,-50.673 13.328,-46.362 13.328,-32.646 14.732,-31.242 14.732,-28.321 ; v1(19.558,-17.526) 14.732,-22.352 14.732,-28.321 ; U1.2 54.229,-8.89 v1(51.054,-12.065) 51.054,-14.605 52.768,-16.319 pad.@55.181,-16.319
  Bottom Layer w0.508: 56.261,-77.47 56.388,-77.597
  Bottom Layer w0.7: C12.2@6.477,-81.341 7.427,-81.341 v1@8.911,-82.825
  Bottom Layer w1: v1(13.446,-80.764) 56.38,-80.764 58.293,-82.677 58.293,-90.678 60.833,-93.218 P4.1 ; v1(19.558,-17.526) 21.209,-15.875 25.4,-15.875 28.702,-12.573 34.774,-12.573 37.314,-10.033 41.656,-10.033 43.053,-11.43 P8.1 ; P8.1@43.053,-12.573 43.561,-12.065 v1(51.054,-12.065) ; 56.388,-80.518 56.388,-77.597
VDD: C9.2 C10.2 P1.11 P4.7 P8.3 pad.@37.973,-16.383 pad.@40.513,-16.383 pad.@49.149,-21.59 pad.@55.245,-11.303 | length 179
  Top Layer w0.508: 35.784,-14.194 pad.@37.973,-16.383 ; P8.3@37.973,-12.954 P8.3
  Top Layer w1: v1(16.764,-61.595) 13.97,-64.389 13.97,-70.553 15.815,-72.398 56.269,-72.398 P4.7
  Top Layer w1.5: v1(20.574,-22.209) 24.765,-18.018 24.765,-16.764 27.335,-14.194 35.784,-14.194 ; 36.098,-14.194 P8.3
  Bottom Layer w0.254: pad.@37.976,-16.383 40.513,-16.383 pad.@40.513,-16.637
  Bottom Layer w0.508: pad.@40.513,-16.637 41.91,-18.034 44.958,-18.034 46.228,-19.304 46.228,-21.59 48.895,-21.59 pad.@49.149,-21.844
  Bottom Layer w1: P8.3 37.973,-13.462 38.862,-14.351 51.943,-14.351 53.34,-12.954 53.34,-12.132 54.169,-11.303 pad.@55.245,-11.303
  Bottom Layer w1.5: P1.11 16.764,-55.626 ; v1(16.764,-61.595) 16.764,-55.626 ; v1(20.574,-22.209) 20.574,-32.131 16.764,-35.941 16.764,-55.626
VGA_PWR: J1.9 P8.2 | length 19.9
  Top Layer w1: 24.384,-7.874 28.194,-11.684 34.417,-11.684 36.068,-10.033 39.243,-10.033 40.513,-11.303 P8.2
VSync: J1.14 R19.1 R29.1 | length 30
  Top Layer w0.254: v1(18.796,-2.032) 19.431,-2.032 21.602,-4.203 21.602,-5.969 J1.14@21.348,-6.223
  Bottom Layer w0.254: R19.1@14.097,-19.243 14.097,-18.288 19.685,-12.7 24.257,-12.7 25.534,-11.423 25.534,-9.151 23.368,-6.985 22.659,-6.985 21.897,-6.223 J1.14@21.348,-6.223 ; v1(18.796,-2.032) 19.878,-2.032 R29.1
pads on no net: J1.4 J1.11 J1.12 J1.15 J2. J2.3 J2.5 J3. P3.2 P4.3 P6.1 P6.2 P6.3 P6.4 P6.5 P7.1 P7.2 P7.3 P7.5 P7.6 P7.7 P7.8 P7.9 P7.10 SW4.3 U1.

## Polygon pours and split planes (outlines as drawn)
GND on Top Layer "ground" (solid, remove dead copper, pour order 32): 55.245,-70.485 53.721,-68.961 53.594,-68.961 53.594,-59.436 56.007,-59.436 56.388,-59.053 56.388,-17.78 65.427,-17.78 65.427,3.247 -3.175,3.247 -3.175,-95.885 65.405,-95.885 65.405,-70.485
VGA_PWR on Top Layer "vga_pwr" (solid, remove dead copper, pour order 28): 25.781,-8.509 23.907,-6.635 20.955,-6.858 19.939,-7.772 19.939,-8.738 20.955,-9.652 25.781,-9.878
GND on Bottom Layer "ground" (solid, remove dead copper, pour order 30): 55.245,-70.485 53.594,-68.834 53.594,-59.436 56.007,-59.434 56.388,-59.053 56.388,-17.78 65.427,-17.78 65.427,3.247 -3.175,3.247 -3.175,-95.885 65.405,-95.885 65.405,-70.485

## Keep-outs
Keep-Out Layer:
  lines w0.1: -3.225,-95.885 ccw(c-3.175,-95.885) -3.175,-95.935 ; -3.225,-95.885 ccw(c-3.175,-95.885) -3.175,-95.935 ; -3.225,-95.885 -3.225,3.175 ; -3.225,3.175 cw(c-3.175,3.175) -3.175,3.225 ; -3.225,3.175 cw(c-3.175,3.175) -3.175,3.225 ; -3.175,-95.935 65.405,-95.935 ; -3.175,3.225 65.405,3.225 ; 33.565,-33.125 ccw(c33.565,-52.075) 18.719,-40.298 18.719,-63.852 ccw(c33.565,-52.075) 33.565,-71.025 ccw(c33.565,-52.075) 52.515,-52.075 ; 33.565,-33.125 cw(c33.565,-52.075) 52.515,-52.075 ; 33.565,-33.125 ccw(c33.565,-52.075) 33.565,-33.125 ; 33.565,-33.125 ccw(c33.565,-33.075) 33.565,-33.125 ; 52.515,-52.075 ccw(c52.565,-52.075) 52.515,-52.075 ; 52.515,-52.075 ccw(c33.565,-52.075) 52.515,-52.075 ; 56.007,-59.486 ccw(c56.007,-59.436) 56.042,-59.471 ; 56.007,-59.486 ccw(c56.007,-59.436) 56.043,-59.471 ; 56.007,-59.486 53.644,-59.486 53.644,-68.813 55.266,-70.435 65.405,-70.435 ; 56.042,-59.471 56.043,-59.471 ; 56.043,-59.471 56.423,-59.091 ; 56.423,-59.09 ccw(c56.388,-59.055) 56.438,-59.055 ; 56.423,-59.091 ccw(c56.388,-59.055) 56.438,-59.055 ; 56.423,-59.091 56.423,-59.09 ; 56.438,-59.055 56.438,-17.83 65.405,-17.83 ; 65.405,-95.935 ccw(c65.405,-95.885) 65.455,-95.885 ; 65.405,-95.935 ccw(c65.405,-95.885) 65.455,-95.885 ; 65.405,-70.435 cw(c65.405,-70.485) 65.455,-70.485 ; 65.405,-70.435 cw(c65.405,-70.485) 65.455,-70.485 ; 65.405,-17.83 ccw(c65.405,-17.78) 65.455,-17.78 ; 65.405,-17.83 ccw(c65.405,-17.78) 65.455,-17.78 ; 65.405,3.225 cw(c65.405,3.175) 65.455,3.175 ; 65.405,3.225 cw(c65.405,3.175) 65.455,3.175 ; 65.455,-95.885 65.455,-70.485 ; 65.455,-17.78 65.455,3.175

## Other copper
Bottom Layer:
  pour cut-out: 37.844,-17.396 40.384,-17.396 40.384,-15.367 37.848,-15.367 37.844,-15.364

## Silkscreen, mask and mechanical layers (free items; w line width, h text height)
Top Overlay:
  lines w0.254: 13.589,-72.136 53.594,-72.136 53.594,-32.131 13.589,-32.131 13.589,-72.136 ; 47.498,-26.162 47.498,-19.558 50.8,-19.558 50.8,-26.162 47.498,-26.162
  text "on" at -0.762,-4.699 h1.52
  text "+5V" at 52.324,-11.557 h1
  text "I/O Board v5.1" at 61.849,-13.97 h1.52 r90
  text "GND" at 52.197,-14.097 h1
  text "+5v" at 33.782,-14.351 h1.5
  text "+3.3v" at 44.958,-14.351 h1.5
  text "(C)2017 Sorgelig" at 63.627,-14.986 h1.52 r90
  text "+3.3V" at 51.689,-16.637 h1
  text "5V" at 48.26,-18.935 h1.5
  text "+" at 51.181,-22.352 h1.52
  text "-" at 51.181,-24.892 h1.52
  text "VREF" at 51.689,-26.924 h1
  text "GND" at 52.07,-29.464 h1
  text "Fan" at 46.609,-30.099 h1.52

## Text inside footprints (layer, text, board x,y; h text height)
LED1: Top Overlay "K" at 21.669,-76.581 h1.6; Mechanical 15 "K" at 21.542,-77.47 h1.6
LED2: Top Overlay "K" at 33.861,-76.581 h1.6; Mechanical 15 "K" at 33.734,-77.47 h1.6
LED3: Top Overlay "K" at 46.053,-76.581 h1.6; Mechanical 15 "K" at 45.926,-77.47 h1.6